# EAGLE board heart_eyes_gold (EAGLE 9.5.2)
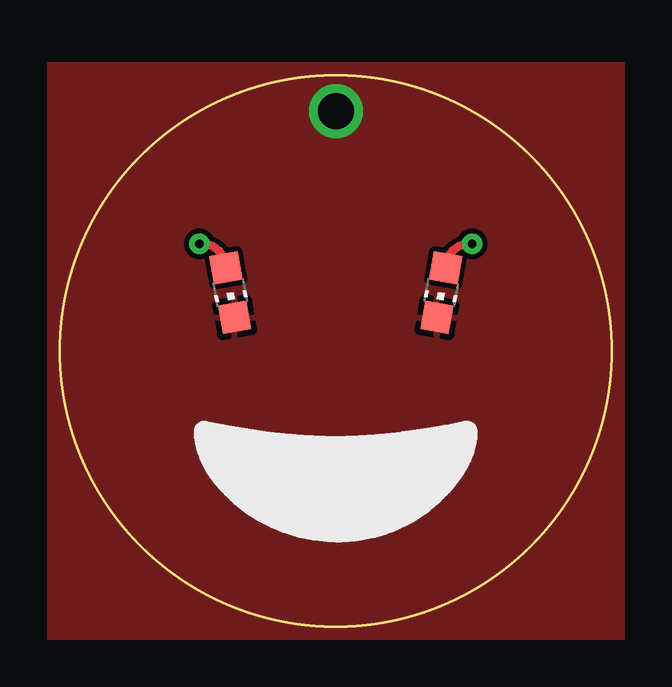
[diagram p0: board, top side]
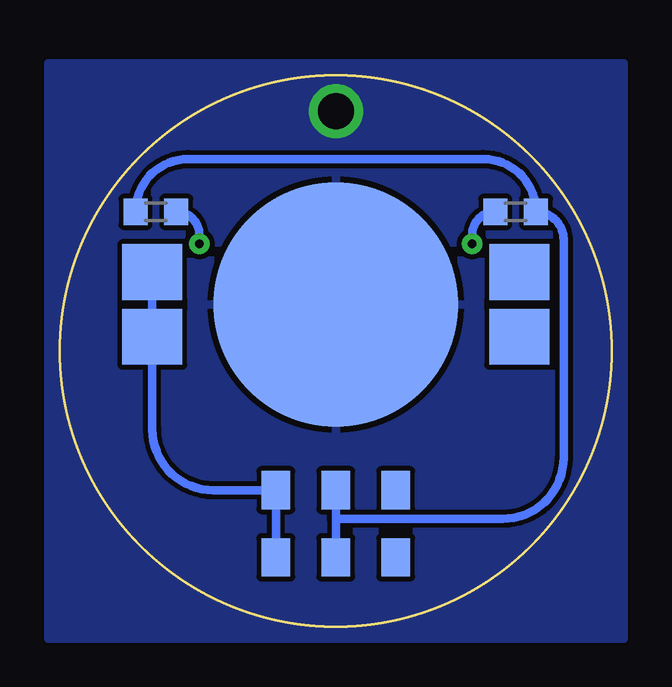
[diagram p1: board, bottom side, seen from below]

Size 23 x 23 mm. Coordinates in mm from the lower left corner, seen from the top.
Outline: circle at 11.5,11.5 radius 11.5
Copper layers (1*16): Top 0.035mm / dielectric 1.5mm / Bottom 0.035mm
Design rules "SparkFun *": minimum track width 8mil, minimum drill 20mil, track to track 8mil, track to pad 8mil, pad to pad 8mil, via to via 8mil, smd to smd 8mil, copper to edge 0mil, drill to drill 8mil, minimum pad ring 12mil, minimum via ring 10mil, stop-mask expansion 4mil, vias tented up to drill 0.35mm, thermal gap 10mil

## Footprints (pad centres in the part's own frame; a part is rotated, then mirrored left to right if it is on the bottom)
CHIP-LED0805 = smd 1.2 x 1.2: A 0,-1.05; C 0,1.05
R0603 = smd 1 x 1.1: 1 -0.85,0; 2 0.85,0
CL-SB-22A-02T-DPDT-COMPACT-SWITCH = smd 1.2 x 1.6: P$1 -2.5,-1.4; P$2 0,-1.4; P$3 2.5,-1.4; P$4 -2.5,1.4; P$5 0,1.4; P$6 2.5,1.4
BATHLD012SMT = smd 2.5 x 2.325: 1 -7.65,1.35; 2 7.65,1.35; P$2 -7.65,-1.35; P$3 7.65,-1.35 | smd 10.2 x 10.2: P$1 0,0

## Placement (x,y rotation side)
LED1  [CHIP-LED0805]  7.1,13.93 190 top
LED2  [CHIP-LED0805]  15.9,13.93 170 top
R2  [R0603]  4,17.3 180 bottom
R3  [R0603]  19,17.3 0 bottom
U$1  CL-SB-22A-02T-SLIDE-SWITCH-TUCKED-PADS  [CL-SB-22A-02T-DPDT-COMPACT-SWITCH]  11.5,4.29 180 bottom
VBAT  BAT-HLD-012-SMT  [BATHLD012SMT]  11.5,13.44 0 bottom

## Library data of the parts
LED1 LED2 = led
R2 R3 = rcl; SPICEPREFIX: R
U$1 = electroninks
VBAT = SamacSys_Parts; DESCRIPTION: Coin Cell Battery Holders Bat Hld CR1216/1225 Surface Mount; HEIGHT: 3mm; MANUFACTURER_NAME: Linx Technologies; MANUFACTURER_PART_NUMBER: BAT-HLD-012-SMT; MOUSER_PART_NUMBER: 712-BAT-HLD-012-SMT; MOUSER_PRICE-STOCK: https://www.mouser.com/Search/Refine.aspx?Keyword=712-BAT-HLD-012-SMT

## Nets
GND: LED1.C LED2.C VBAT.P$1
N$1: LED1.A R2.2
N$2: LED2.A R3.2
VBAT: U$1.P$3 U$1.P$6 VBAT.1
VCC: R2.1 R3.1 U$1.P$2 U$1.P$5

## Tracks (layer width: path | path; a pad name or v marks a point on that pad's centre or on a via)
GND  (via drill 1.5)
  other vias: 11.5,21.5
  pour Top: -0.5,-0.5 -0.5,23.5 23.5,23.5 23.5,-0.5
  pour Bottom: -0.5,-0.5 -0.5,23.5 23.5,23.5 23.5,-0.5
N$1  (via drill 0.35)
  Top 0.35: v5.81,15.97 5.92,15.97 arc-90 LED1.A
  Bottom 0.35: R2.2 arc-90 5.81,16.34 v5.81,15.97
N$2  (via drill 0.35)
  Top 0.35: v17.19,15.97 17.08,15.97 arc90 LED2.A
  Bottom 0.35: R3.2 arc90 17.19,16.34 v17.19,15.97
VBAT
  Bottom 0.35: VBAT.1 19.15,8.23 arc-90 16.61,5.69 U$1.P$3 U$1.P$6
VCC
  Bottom 0.35: U$1.P$5 U$1.P$2 11.5,4.5 4.54,4.5 arc-90 2,7.04 2,16.15 arc-90 R2.1 arc-90 5.35,19.5 17.65,19.5 arc-90 R3.1